# Altium PCB HDDA_encoder.PcbDoc
Units mil, origin at the board's own origin, x right, y up, seen from the top; angles counter-clockwise.
Board outline 1496.06 x 1496.06 mil, 2 copper layers (Component Side, Bottom Layer), stack 63 mil thick; 4 components, 6 nets, 30 pads, 6 vias.
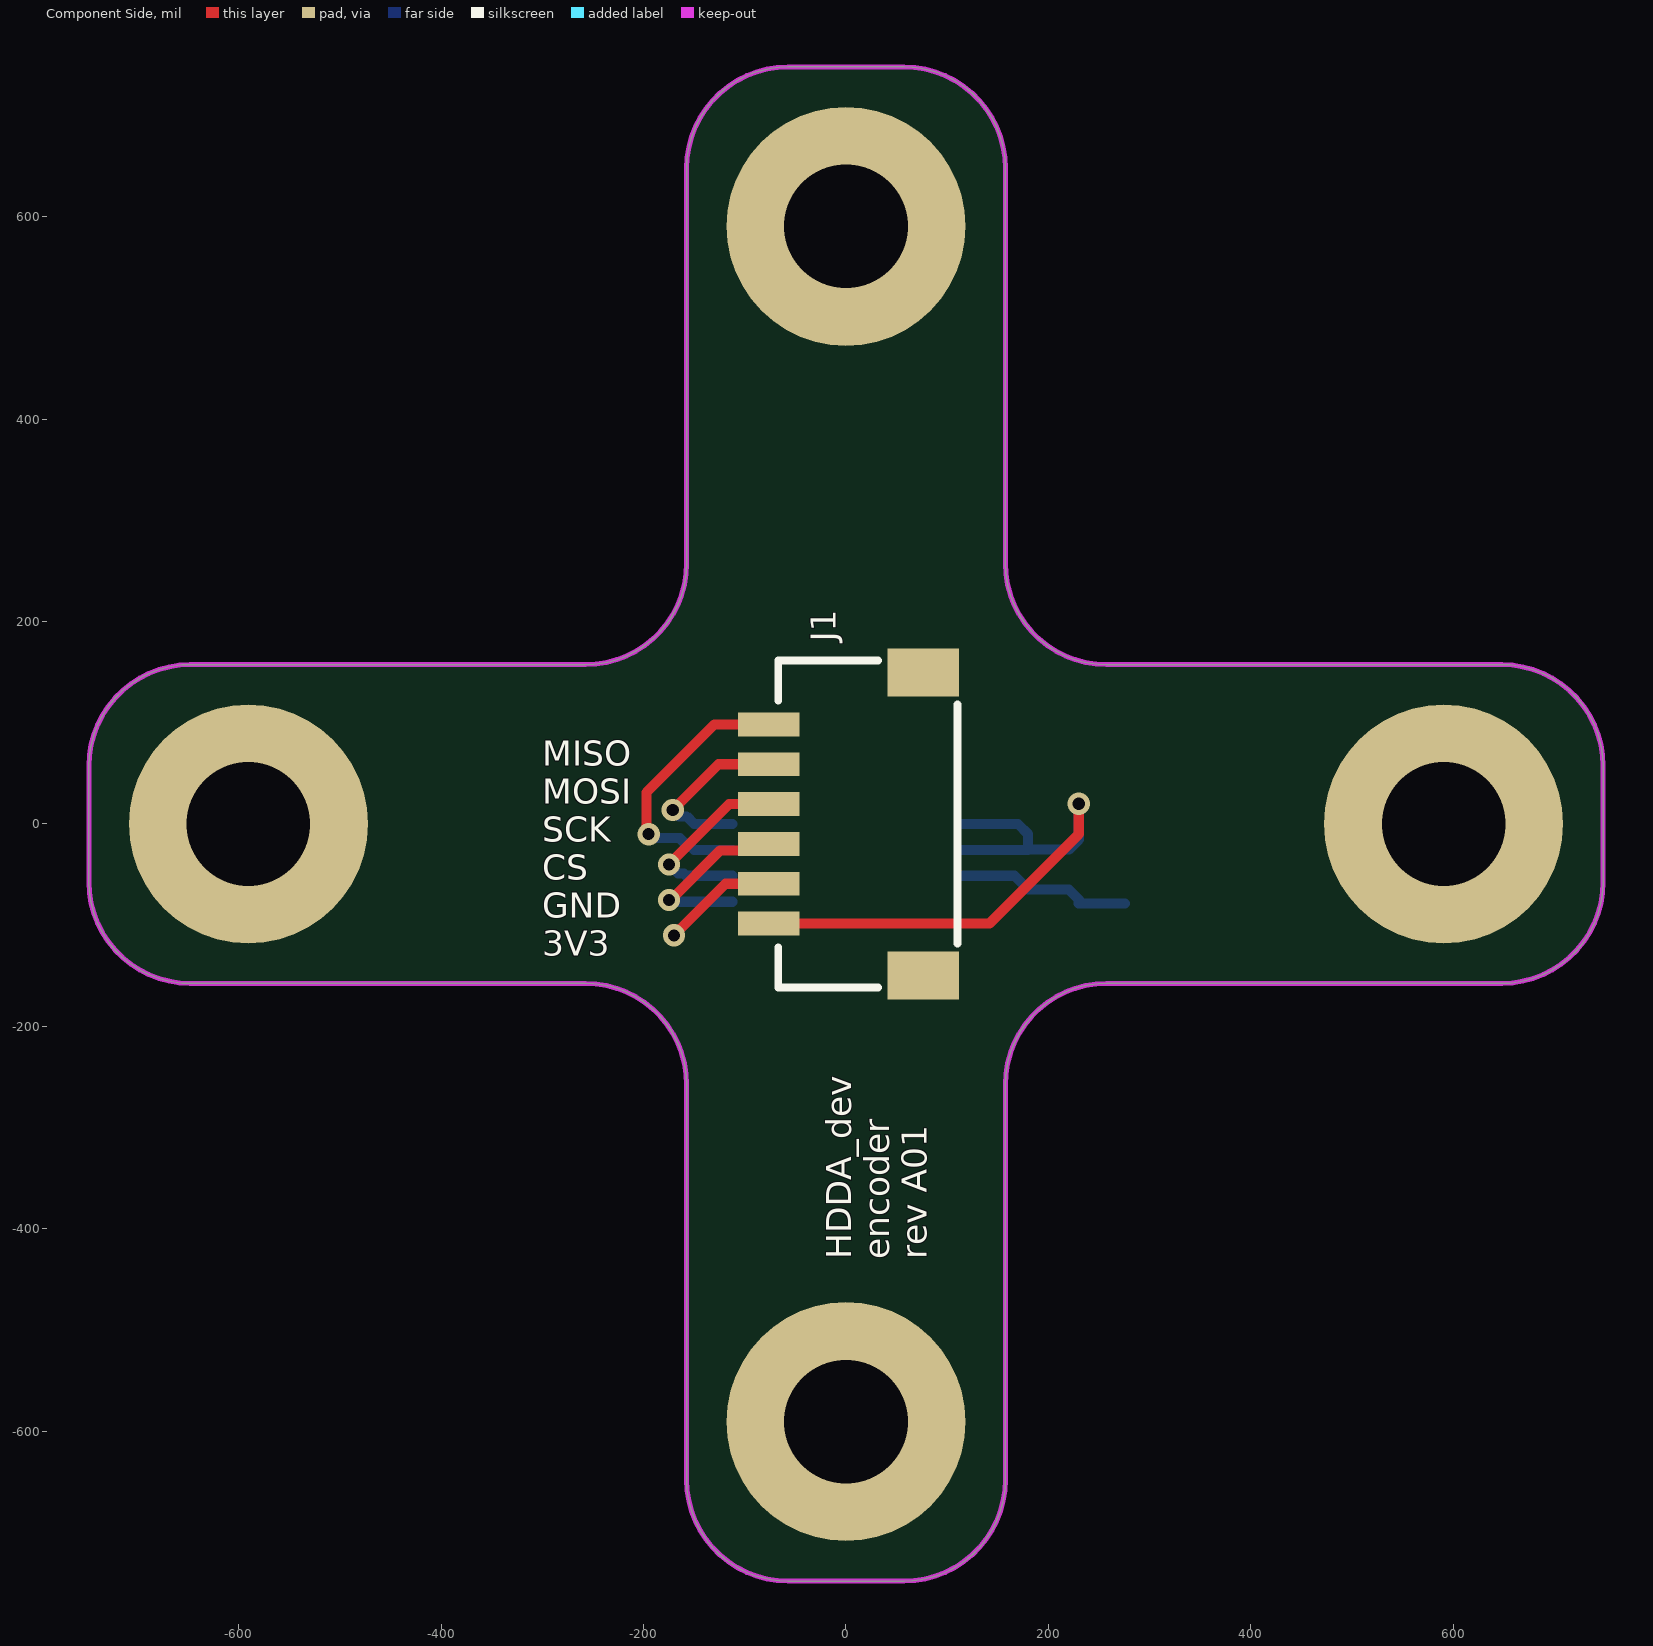
[diagram p0: Component Side view]
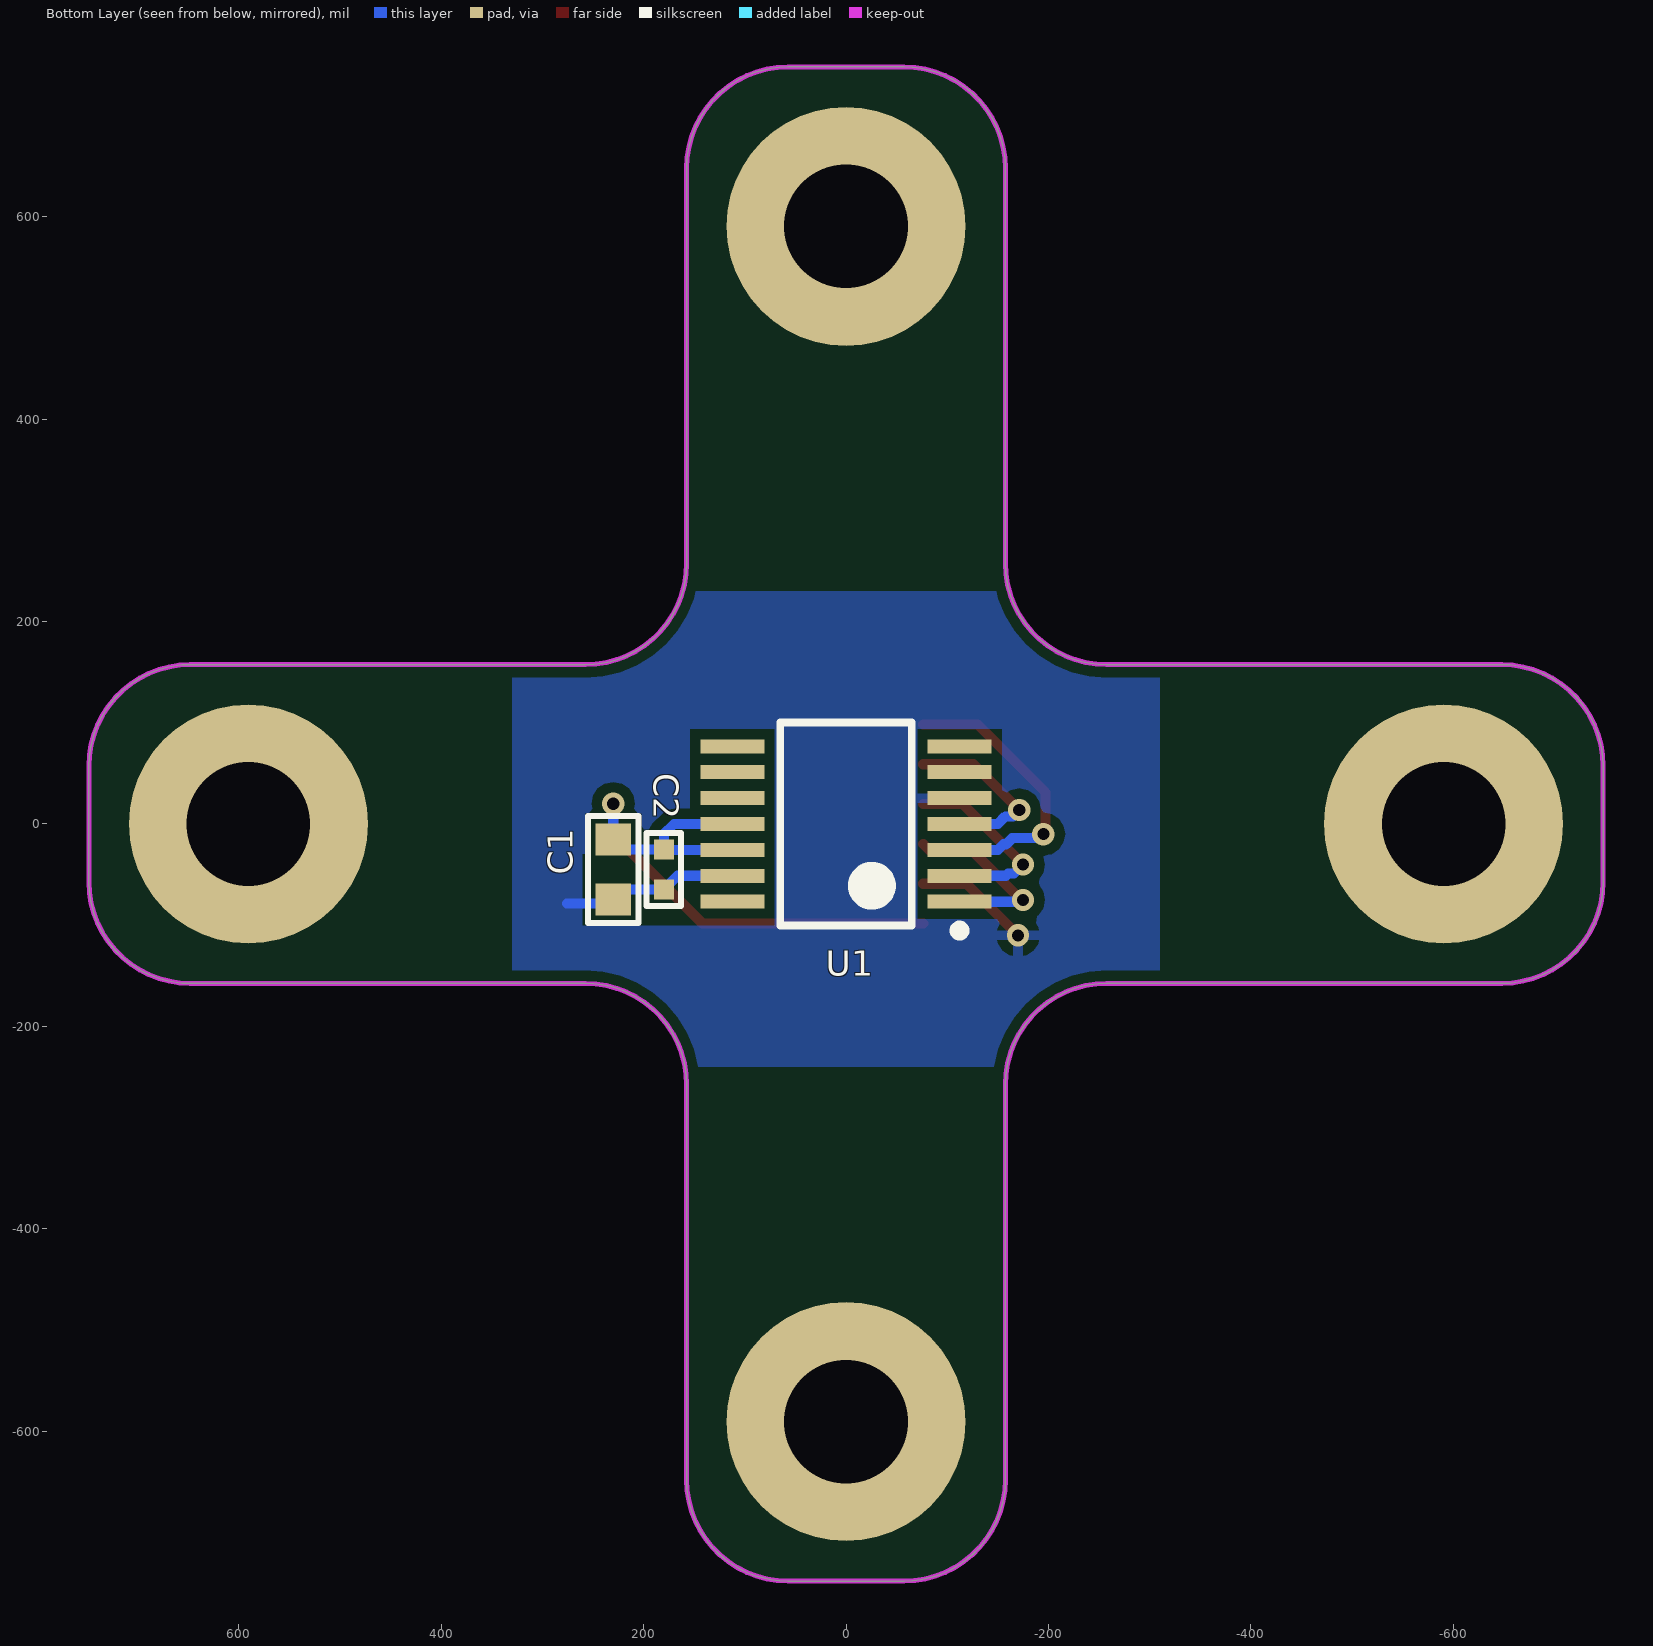
[diagram p1: Bottom Layer view, seen from below]

## Layer stack, top to bottom
Top Solder: solder mask 0.4, Solder Resist, Dk 3.5
Component Side: signal copper 1.4
Dielectric 1: core 60.2, FR-4, Dk 4.2
Bottom Layer: signal copper 1.4
Solder Side: solder mask 0.4, Solder Resist, Dk 3.5

## Board outline
-648.03,-157.48 -257.48,-157.48 cw(c-257.48,-257.48) -157.48,-257.48 -157.48,-648.03 ccw(c-57.48,-648.03) -57.48,-748.03 57.48,-748.03 ccw(c57.48,-648.03) 157.48,-648.03 157.48,-257.48 cw(c257.48,-257.48) 257.48,-157.48 648.03,-157.48 ccw(c648.03,-57.48) 748.03,-57.48 748.03,57.48 ccw(c648.03,57.48) 648.03,157.48 257.48,157.48 cw(c257.48,257.48) 157.48,257.48 157.48,648.03 ccw(c57.48,648.03) 57.48,748.03 -57.48,748.03 ccw(c-57.48,648.03) -157.48,648.03 -157.48,257.48 cw(c-257.48,257.48) -257.48,157.48 -648.03,157.48 ccw(c-648.03,57.48) -748.03,57.48 -748.03,-57.48 ccw(c-648.03,-57.48)

## Design rules (kind name [scope] priority, off if disabled: settings)
Clearance [All] p1: gap=10
HoleSize [All] p1: absolutevalues=TRUE maxlimit=200 minlimit=0.98 maxpercent=80.000 minpercent=20.000
MinimumSolderMaskSliver [All] p1 off: minsoldermaskwidth=10
PolygonConnect [All] p1: connectstyle=Relief reliefconductorwidth=10 reliefentries=4 polygonreliefangle="90 Angle" airgapwidth=10
RoutingVias [All] p1: holewidth=12 width=22 viastyle="Through Hole" minholewidth=12 minwidth=22 maxholewidth=28 maxwidth=50
SilkToBoardRegionClearance [All] p1 off:
SilkToSilkClearance [All] p1 off: silktosilkclearance=10
SilkToSolderMaskClearance [IsPad] p1 off: minsilkscreentomaskgap=10 clearancetoexposedcopper=TRUE
SolderMaskExpansion [All] p1: expansion=4
Width [All] p1: maxlimit=10 minlimit=10 preferedwidth=10
25 further rules are at their usual default settings.

## Components (designator, comment, footprint, x,y, rotation, side; value= is the part's Value field where it differs from the comment)
C1 "10uF" C0603 230,-45 r270 bottom
C2 "0.1µF" C0402 180,-45 r270 bottom
J1 "SM06B-SRSS-TB(LF)(SN)" SM06B-SRSS-TB 0,0 r90 top
U1 "AS5047P-ATSM" AS5047X 0,0 r0 bottom

## Footprints (in the part's own frame and the unit in brackets; to place one, negate y for a bottom-side part, rotate by r counter-clockwise, add the part's x,y. Pads: shape width x height; smd on the part's side, far side on the other; paste and mask are expansions set on the pad)
AS5047X [mm] "TSSOP-14 from AMS AS5047"
  rect 1.6x0.35 smd: 1(-2.85,1.95) 2(-2.85,1.3) 3(-2.85,0.65) 4(-2.85,0) 5(-2.85,-0.65) 6(-2.85,-1.3) 7(-2.85,-1.95) 8(2.85,-1.95) 9(2.85,-1.3) 10(2.85,-0.65) 11(2.85,0) 12(2.85,0.65) 13(2.85,1.3) 14(2.85,1.95)
  silkscreen extent -2.97,-2.55 1.65,2.8, body extent -2.25,-2.55 2.25,2.55, height 1.2
C0402 [mm] "Based on Yageo and Taiyo Yuden suggested footprints"
  rect 0.5x0.5 smd: 1(-0.5,0) 2(0.5,0)
  silkscreen extent -0.91,-0.43 0.91,0.43, body extent -0.53,-0.28 0.53,0.28, height 0.55
C0603 [mm] "Based on Yageo datasheets"
  rect 0.8x0.9 smd: 1(-0.75,0) 2(0.75,0)
  silkscreen extent -1.35,-0.64 1.35,0.64, body extent -0.88,-0.48 0.87,0.48, height 0.9
SM06B-SRSS-TB [mm] "JST SH 6 pin side entry"
  rect 1.2x1.8 smd: 0(-3.8,-1.937) 0(3.8,-1.938)
  rect 0.6x1.55 smd: 1(-2.5,1.938) 2(-1.5,1.938) 3(-0.5,1.938) 4(0.5,1.938) 5(1.5,1.938) 6(2.5,1.938)
  silkscreen extent -4.1,-2.8 4.1,1.7, body extent -4,-2.69 4,2.26, height 2.95

## Part data
C1: library part C1608X5R1A106K080AC, "CAP CER 10UF 10V 10% X5R 0603"
C2: library part C1005X7R1H104K050BB, "CAP CER 0.1UF 50V 10% X7R 0402"
J1: "CONN HEADER SH 6POS SIDE 1MM TIN"
U1: "IC ENCODER ROTARY 14TSSOP"

## Free pads (board coordinates)
  round 236.22 hole 122.05: H(-590.55,0) H(0,-590.55) H(0,590.55) H(590.55,0)

## Via types
v1: diameter 22, hole 12, Component Side to Bottom Layer, tented both sides, 6 vias

## Nets (pads, with @x,y where several pads share a name; then routed paths per layer and width w, separated by ;. In a path a pad name is that pad's centre, name@x,y a point inside that pad or via, vN(x,y) a via of type N, cw(c..) or ccw(c..) an arc to the next point about the centre after c; other vN are vias at no path point)
3V3: C1.1 C2.1 J1.1 U1.11 U1.12 | length 617.6
  Component Side w10: J1.1 141.57,-98.43 230,-10 v1(230,20)
  Bottom Layer w10: U1.12 179.72,-25.59 C2.1 ; U1.11 170,0 180,-10 C2.1 ; v1(230,20) C1.1 220.16,-25.32 C2.1
ENC_CS1: J1.3 U1.1 | length 185.2
  Component Side w10: v1(-175,-75) -173.23,-75 -124.23,-26 -82.59,-26 J1.3
  Bottom Layer w10: v1(-175,-75) -173.23,-76.77 U1.1
GND: C1.2 C2.2 J1.2 U1.5 U1.13 | length 292.1
  Component Side w10: v1(-170,-110) -119.06,-59.06 J1.2
  Bottom Layer w10: U1.13 166.5,-51.18 C2.2 220.16,-64.69 C1.2 230,-78.74 275.59,-78.74
MISO: J1.6 U1.3 | length 280.1
  Component Side w10: v1(-195,-10) -197.2,-7.8 -197.2,31.23 -130,98.43 J1.6
  Bottom Layer w10: v1(-195,-10) -191,-14 -164.23,-14 -158.23,-20 -155.72,-20 -150.13,-25.59 U1.3
MOSI: J1.5 U1.4 | length 178.4
  Component Side w10: v1(-171.2,13.8) -125.94,59.06 J1.5
  Bottom Layer w10: v1(-171.2,13.8) -164.92,7.53 -157.47,7.53 -149.95,0 U1.4
SCK: J1.4 U1.2 | length 190.9
  Component Side w10: v1(-175,-40) -115.31,19.69 J1.4
  Bottom Layer w10: v1(-175,-40) -166,-49 -160,-49 -157.82,-51.18 U1.2
pads on no net: J1.0 U1.6 U1.7 U1.8 U1.9 U1.10 U1.14

## Polygon pours and split planes (outlines as drawn)
GND on Bottom Layer "gnd" (solid, remove dead copper, pour order 0): -310,230 330,230 330,-240 -310,-240

## Keep-outs
Keep-Out Layer:
  lines w5: -748.03,-57.48 ccw(c-648.03,-57.48) -648.03,-157.48 -590.55,-157.48 -257.48,-157.48 cw(c-257.48,-257.48) -157.48,-257.48 -157.48,-590.55 -157.48,-648.03 ccw(c-57.48,-648.03) -57.48,-748.03 0,-748.03 57.48,-748.03 ccw(c57.48,-648.03) 157.48,-648.03 157.48,-629.92 157.48,-257.48 cw(c257.48,-257.48) 257.48,-157.48 590.55,-157.48 648.03,-157.48 ccw(c648.03,-57.48) 748.03,-57.48 748.03,0 748.03,57.48 ccw(c648.03,57.48) 648.03,157.48 590.55,157.48 257.48,157.48 cw(c257.48,257.48) 157.48,257.48 157.48,590.55 157.48,648.03 ccw(c57.48,648.03) 57.48,748.03 0,748.03 -57.48,748.03 ccw(c-57.48,648.03) -157.48,648.03 -157.48,590.55 -157.48,257.48 cw(c-257.48,257.48) -257.48,157.48 -590.55,157.48 -648.03,157.48 ccw(c-648.03,57.48) -748.03,57.48 -748.03,0 -748.03,-57.48

## Other copper
Bottom Layer:
  pour cut-out: 70.71,-100 260,-100 260,-30 70.71,-30

## Silkscreen, mask and mechanical layers (free items; w line width, h text height)
Top Overlay:
  text "MISO / MOSI / SCK / CS / GND / 3V3" at -300,-130 h25
  text "HDDA_dev / encoder / rev A01" at 80,-430 h25 r90
Mechanical 1:
  lines w5: -748.03,-57.48 ccw(c-648.03,-57.48) -648.03,-157.48 -590.55,-157.48 -257.48,-157.48 cw(c-257.48,-257.48) -157.48,-257.48 -157.48,-590.55 -157.48,-648.03 ccw(c-57.48,-648.03) -57.48,-748.03 0,-748.03 57.48,-748.03 ccw(c57.48,-648.03) 157.48,-648.03 157.48,-629.92 157.48,-257.48 cw(c257.48,-257.48) 257.48,-157.48 590.55,-157.48 648.03,-157.48 ccw(c648.03,-57.48) 748.03,-57.48 748.03,0 748.03,57.48 ccw(c648.03,57.48) 648.03,157.48 590.55,157.48 257.48,157.48 cw(c257.48,257.48) 157.48,257.48 157.48,590.55 157.48,648.03 ccw(c57.48,648.03) 57.48,748.03 0,748.03 -57.48,748.03 ccw(c-57.48,648.03) -157.48,648.03 -157.48,590.55 -157.48,257.48 cw(c-257.48,257.48) -257.48,157.48 -590.55,157.48 -648.03,157.48 ccw(c-648.03,57.48) -748.03,57.48 -748.03,0 -748.03,-57.48